# EAGLE board L1-Main (EAGLE 7.2.0)
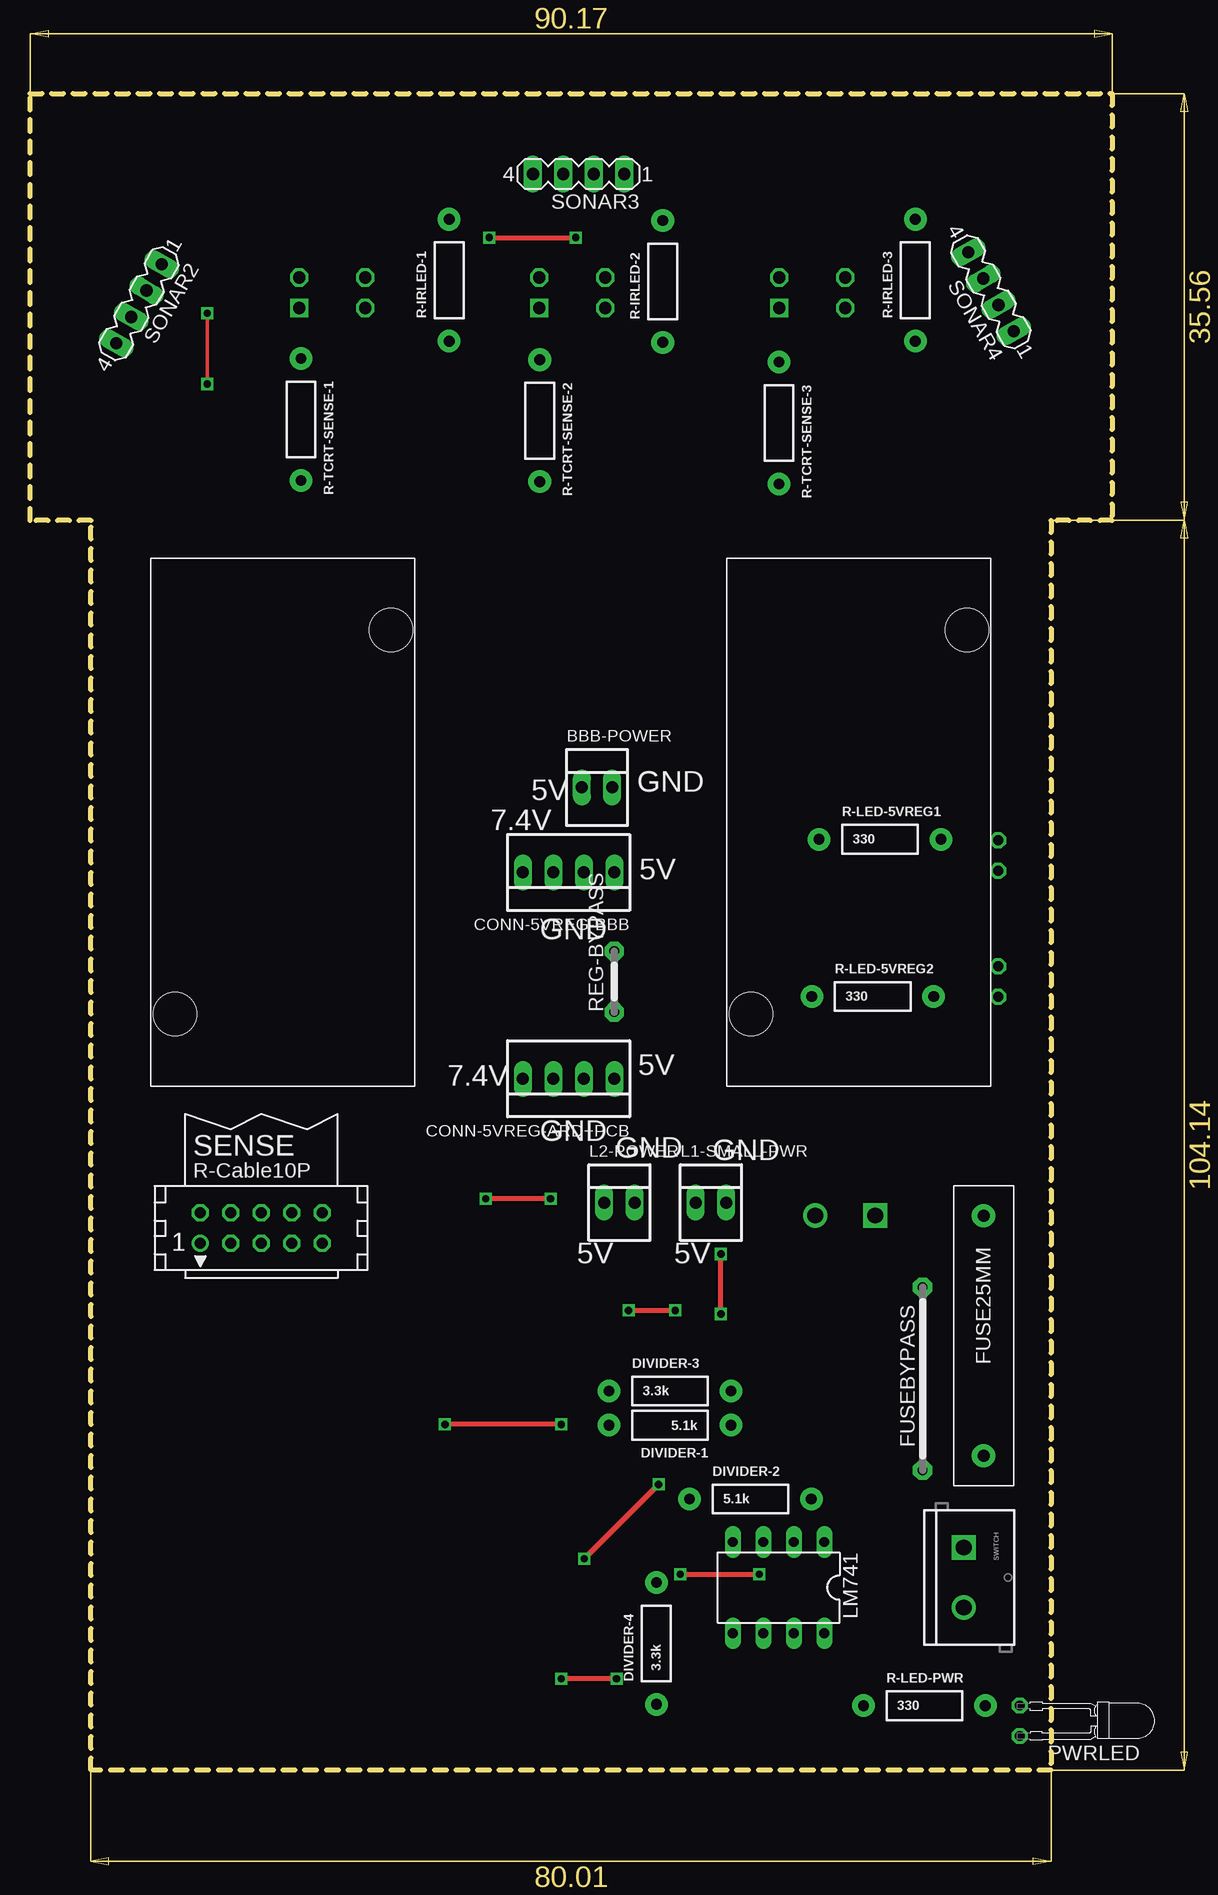
[diagram p0: board, top side]
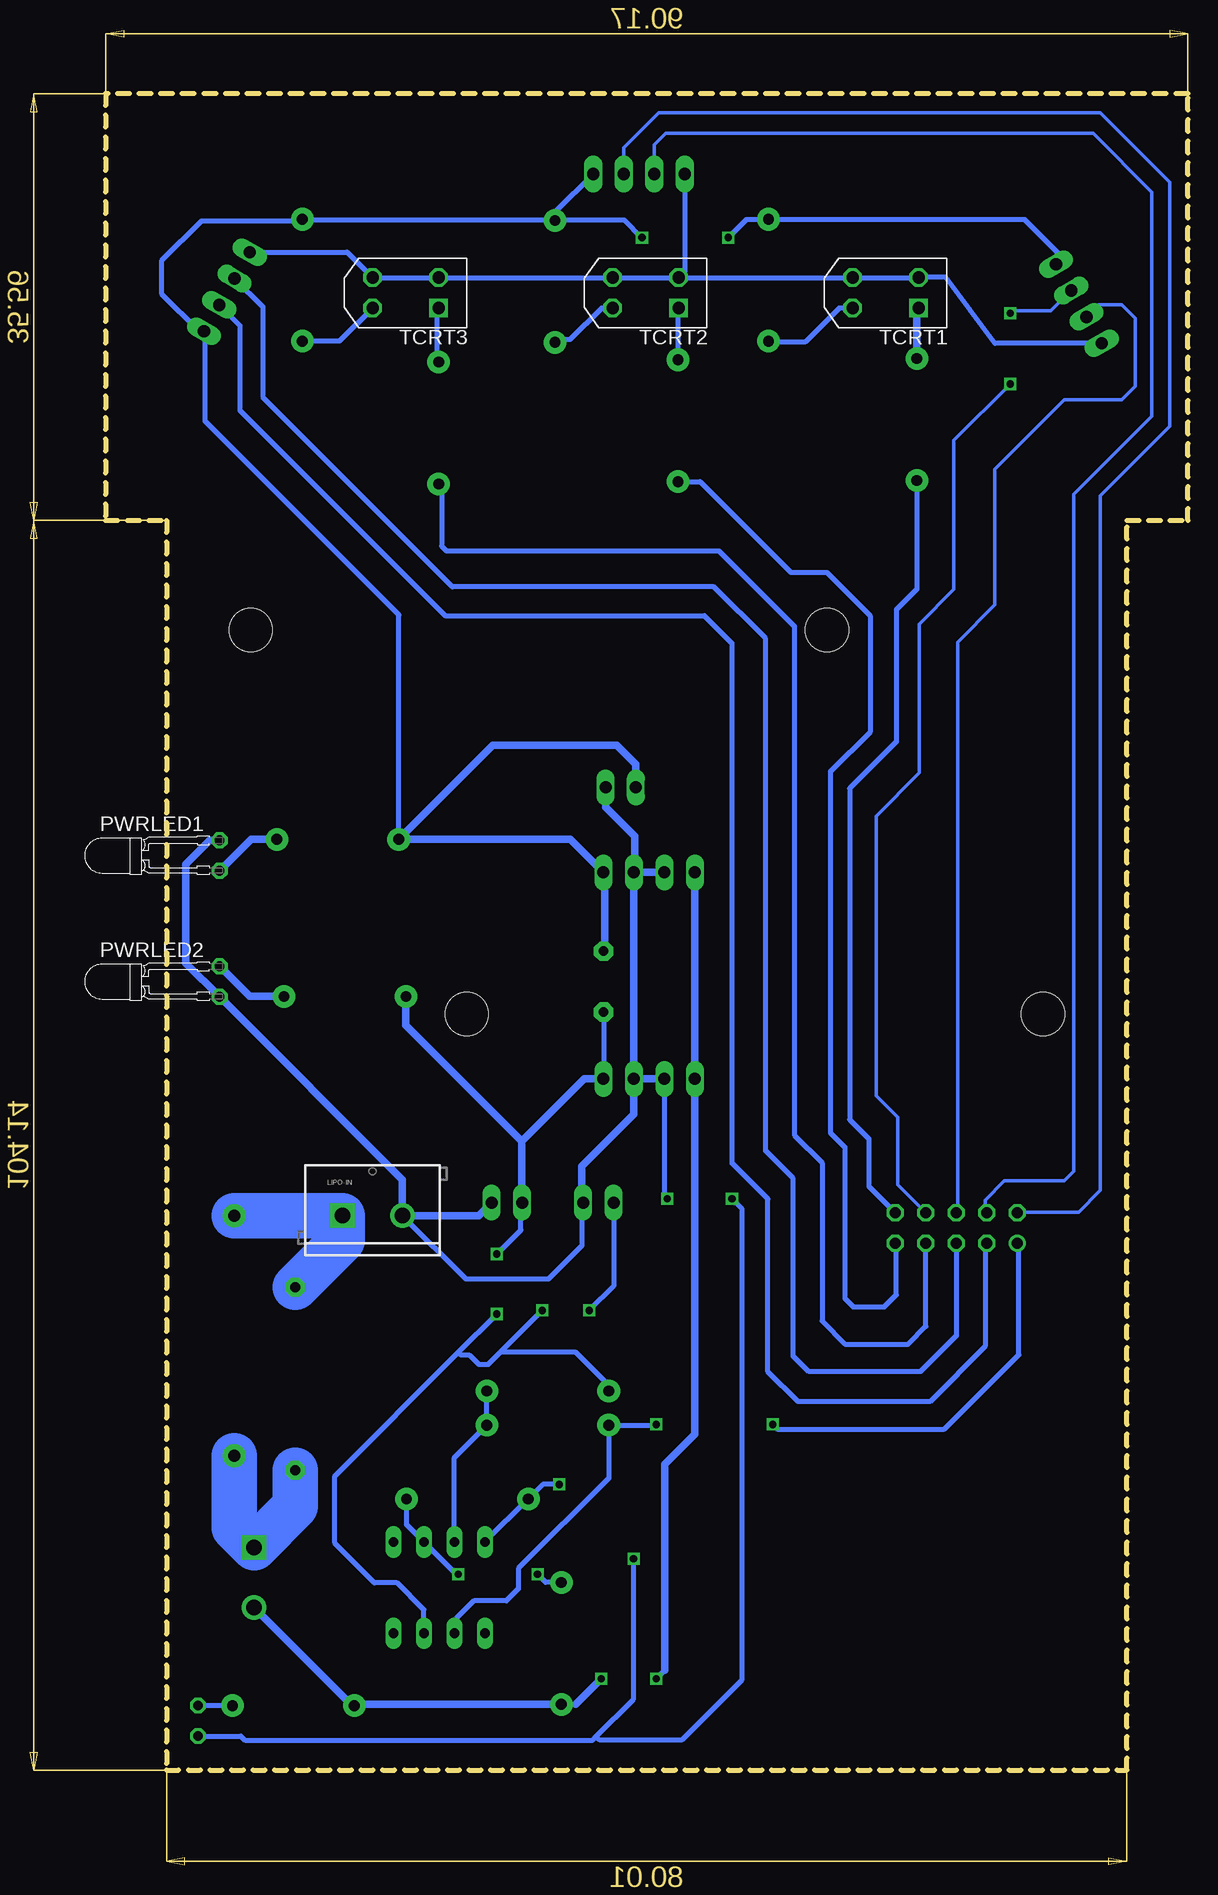
[diagram p1: board, bottom side, seen from below]

Size 90.17 x 139.7 mm. Coordinates in mm from the lower left corner, seen from the top.
Outline: 5.08,0 5.08,104.14 0,104.14 0,139.7 90.17,139.7 90.17,104.14 85.09,104.14 85.09,0 5.08,0
Copper layers (1*16): Top 0.035mm / dielectric 1.5mm / Bottom 0.035mm
Design rules "default": minimum track width 10mil, minimum drill 24mil, track to track 8mil, track to pad 8mil, pad to pad 8mil, via to via 8mil, smd to smd 8mil, copper to edge 40mil, drill to drill 8mil, minimum pad ring 10mil, minimum via ring 8mil, stop-mask expansion 4mil, vias tented up to drill 0mil, thermal gap 10mil

## Footprints (pad centres in the part's own frame; a part is rotated, then mirrored left to right if it is on the bottom)
5V3A_REG = hole 3.6: 2,6; 20,38
22-23-2021 = drill 1 long: 1 -1.27,0; 2 1.27,0
22-23-2041 = drill 1 long: 1 -3.81,0; 2 -1.27,0; 3 1.27,0; 4 3.81,0
AXIAL-0.4 = drill 0.9 pad 1.88: P$1 -5.08,0; P$2 5.08,0
15 = drill 0.813 pad 1.6 octagon: 1 -7.62,0; 2 7.62,0
SCREWTERMINAL-5MM-2 = drill 1.3 pad 2.032 square: 1 0,0 | drill 1.3 pad 2.032: 2 5,0
DIL08 = drill 0.813 long: 1 -3.81,-3.81; 2 -1.27,-3.81; 3 1.27,-3.81; 4 3.81,-3.81; 5 3.81,3.81; 6 1.27,3.81; 7 -1.27,3.81; 8 -3.81,3.81
FUSE25MM = drill 1 pad 1.93: PIN1 0,0; PIN2 20,0
LED3MM_H7,5MM = drill 0.813 pad 1.27 octagon: A 0,-1.27; K 0,1.27
05 = drill 0.813 pad 1.6 octagon: 1 -2.54,0; 2 2.54,0
CON10 = drill 0.914: 1 -5.08,-1.27 | drill 0.914 octagon: 2 -5.08,1.27; 3 -2.54,-1.27; 4 -2.54,1.27; 5 0,-1.27; 6 0,1.27; 7 2.54,-1.27; 8 2.54,1.27; 9 5.08,-1.27; 10 5.08,1.27
MA04-1 = drill 1.016 long: 1 -3.81,0; 2 -1.27,0; 3 1.27,0; 4 3.81,0
TCRT = drill 1.016 square: COLLECTOR 2.35,4.17 | drill 1.016 octagon: EMITTER 2.35,1.63; LED-GND 7.85,1.63; LED-VCC 7.85,4.17

## Placement (x,y rotation side)
5VREG-BBB  [5V3A_REG]  10.08,57 0 top
BBB-POWER  [22-23-2021]  47.25,81.88 0 top
CONN-5VREG-ARD+PCB  [22-23-2041]  44.88,57.6 180 top
CONN-5VREG-BBB  [22-23-2041]  44.88,74.8 180 top
DIVIDER-1  5.1k  [AXIAL-0.4]  53.33,28.74 180 top
DIVIDER-2  5.1k  [AXIAL-0.4]  60.03,22.58 0 top
DIVIDER-3  3.3k  [AXIAL-0.4]  53.33,31.58 0 top
DIVIDER-4  3.3k  [AXIAL-0.4]  52.2,10.55 90 top
FUSEBYPASS  [15]  74.38,32.6 90 top
L1-SMALL-PWR  5V  [22-23-2021]  56.74,47.28 0 top
L2-POWER  [22-23-2021]  49.12,47.28 0 top
LIPO-IN  [SCREWTERMINAL-5MM-2]  70.44,46.2 0 bottom
LM741  [DIL08]  62.38,15.2 180 top
PWR-SW  [FUSE25MM]  79.46,26.18 90 top
PWRLED  green  [LED3MM_H7,5MM]  82.48,4.1 180 top
PWRLED1  yellow  [LED3MM_H7,5MM]  80.68,76.2 0 bottom
PWRLED2  yellow  [LED3MM_H7,5MM]  80.68,65.7 0 bottom
R-IRLED-1  [AXIAL-0.4]  34.93,124.15 90 top
R-IRLED-2  [AXIAL-0.4]  52.73,124.05 90 top
R-IRLED-3  [AXIAL-0.4]  73.78,124.15 90 top
R-LED-5VREG1  330  [AXIAL-0.4]  70.83,77.56 0 top
R-LED-5VREG2  330  [AXIAL-0.4]  70.23,64.46 0 top
R-LED-PWR  330  [AXIAL-0.4]  74.53,5.36 0 top
R-TCRT-SENSE-1  [AXIAL-0.4]  22.58,112.54 270 top
R-TCRT-SENSE-2  [AXIAL-0.4]  42.48,112.44 270 top
R-TCRT-SENSE-3  [AXIAL-0.4]  62.42,112.25 270 top
REG-BYPASS  [05]  48.68,65.7 90 top
REG_ARD+PCB  [5V3A_REG]  58.08,57 0 top
SENSE  [CON10]  19.28,45.15 0 top
SONAR2  [MA04-1]  9.08,122.19 240 top
SONAR3  [MA04-1]  45.72,133 180 top
SONAR4  [MA04-1]  80.08,123.19 120 top
SWITCH  [SCREWTERMINAL-5MM-2]  77.81,18.54 270 top
TCRT1  [TCRT]  20.08,126 180 bottom
TCRT2  [TCRT]  40.08,126 180 bottom
TCRT3  [TCRT]  60.08,126 180 bottom

## Library data of the parts
5VREG-BBB REG_ARD+PCB = 5V3ARegulator
BBB-POWER CONN-5VREG-ARD+PCB CONN-5VREG-BBB L1-SMALL-PWR L2-POWER = con-molex
DIVIDER-1-DIVIDER-4 R-IRLED-1-R-IRLED-3 R-LED-5VREG1 R-LED-5VREG2 R-LED-PWR R-TCRT-SENSE-1-R-TCRT-SENSE-3 = SparkFun-Passives
FUSEBYPASS REG-BYPASS = jumper
LIPO-IN SWITCH = SparkFun-Connectors
LM741 = 40xx
PWR-SW = fuse25mm
PWRLED PWRLED1 PWRLED2 = led
SENSE = con-harting
SONAR2-SONAR4 = con-lstb
TCRT1-TCRT3 = tcrt

## Nets
S$1: FUSEBYPASS.2 LIPO-IN.1 PWR-SW.PIN2
S$2: FUSEBYPASS.1 PWR-SW.PIN1 SWITCH.1
S$4: PWRLED.A R-LED-PWR.P$2
S$5: R-IRLED-1.P$1 TCRT1.LED-VCC
S$6: CONN-5VREG-ARD+PCB.4 CONN-5VREG-BBB.4 DIVIDER-4.P$1 R-LED-PWR.P$1 SWITCH.2
S$7: R-TCRT-SENSE-1.P$1 TCRT1.COLLECTOR
S$8: PWRLED1.A R-LED-5VREG1.P$2
S$9: PWRLED2.K R-LED-5VREG2.P$2
S$10: SENSE.3 SONAR4.2
S$11: CONN-5VREG-ARD+PCB.1 DIVIDER-3.P$1 L1-SMALL-PWR.1 L2-POWER.1 LM741.7 R-LED-5VREG2.P$1 REG-BYPASS.1
S$12: SONAR2.4 SONAR3.4 SONAR4.4 TCRT1.EMITTER TCRT1.LED-GND TCRT2.EMITTER TCRT2.LED-GND TCRT3.EMITTER TCRT3.LED-GND
S$13: R-TCRT-SENSE-2.P$1 TCRT2.COLLECTOR
S$14: DIVIDER-1.P$1 DIVIDER-3.P$2 LM741.3
S$15: DIVIDER-2.P$2 DIVIDER-4.P$2 LM741.2
S$16: DIVIDER-1.P$2 LM741.6 SENSE.1
S$17: BBB-POWER.2 CONN-5VREG-ARD+PCB.2 CONN-5VREG-ARD+PCB.3 CONN-5VREG-BBB.2 CONN-5VREG-BBB.3 DIVIDER-2.P$1 L1-SMALL-PWR.2 L2-POWER.2 LIPO-IN.2 LM741.4 PWRLED1.K PWRLED2.A PWRLED.K
S$18: R-IRLED-2.P$1 TCRT2.LED-VCC
S$19: R-TCRT-SENSE-3.P$1 TCRT3.COLLECTOR
S$20: R-IRLED-3.P$1 TCRT3.LED-VCC
S$21: SENSE.5 SONAR4.3
S$22: SENSE.6 SONAR2.3
S$23: SENSE.8 SONAR2.2
S$24: SENSE.4 SONAR3.3
S$25: SENSE.2 SONAR3.2
S$26: R-TCRT-SENSE-3.P$2 SENSE.7
S$27: R-TCRT-SENSE-2.P$2 SENSE.9
S$28: R-TCRT-SENSE-1.P$2 SENSE.10
S$29: BBB-POWER.1 CONN-5VREG-BBB.1 R-IRLED-1.P$2 R-IRLED-2.P$2 R-IRLED-3.P$2 R-LED-5VREG1.P$1 REG-BYPASS.2 SONAR2.1 SONAR3.1 SONAR4.1

## Tracks (layer width: path | path; a pad name or v marks a point on that pad's centre or on a via)
S$1
  Bottom 3.81: FUSEBYPASS.2 70.44,44.16 LIPO-IN.1 70.46,46.18 PWR-SW.PIN2
S$2
  Bottom 3.81: PWR-SW.PIN1 79.46,20.19 SWITCH.1 74.38,21.97 FUSEBYPASS.1
S$4
  Bottom 0.406: R-LED-PWR.P$2 PWRLED.A
S$5
  Bottom 0.406: TCRT1.LED-VCC 29.05,121.83 31.88,119 35.38,119 35.48,118.9 34.98,118.4 34.98,119.02 R-IRLED-1.P$1
S$6  (via drill 0.6)
  Top 0.406: v48.88,7.6 v44.28,7.6
  Bottom 0.406: 69.34,5.47 R-LED-PWR.P$1 69.63,5.36 | DIVIDER-4.P$1 51.01,5.47 | v44.28,7.6 43.58,8.3 | CONN-5VREG-ARD+PCB.4
  Bottom 0.61: CONN-5VREG-ARD+PCB.4 CONN-5VREG-BBB.4 | DIVIDER-4.P$1 69.34,5.47 | 69.63,5.36 SWITCH.2 | 51.01,5.47 v48.88,7.6 | 43.58,8.3 43.58,25.5 41.08,28 CONN-5VREG-ARD+PCB.4
S$7
  Bottom 0.61: R-TCRT-SENSE-1.P$1 22.58,121.68 TCRT1.COLLECTOR
S$8
  Bottom 0.61: R-LED-5VREG1.P$2 78.05,77.56 PWRLED1.A
S$9
  Bottom 0.61: R-LED-5VREG2.P$2 78.17,64.46 PWRLED2.K
S$10
  Bottom 0.406: SONAR4.2 78.98,120.36 78.98,113.3 61.88,96.2 40.28,96.2 37.98,93.9 37.98,50.6 34.98,47.6 34.98,33.2 32.48,30.7 21.48,30.7 16.88,35.3 16.88,43.74 SENSE.3
S$11  (via drill 0.6)
  Top 0.406: v57.58,38 v57.58,43 | v49.88,38.3 v53.78,38.3
  Bottom 0.406: LM741.7 63.65,13.37 65.88,15.6 67.78,15.6 71.08,18.9 71.08,24.5 60.78,34.8 | 60.78,34.8 v57.58,38 | v57.58,43 55.58,45 55.58,47.17 L1-SMALL-PWR.1 | L2-POWER.1 47.85,40.33 v49.88,38.3 | v53.78,38.3 57.28,34.8 | 60.78,34.8 60.58,34.6 59.88,34.6 59.08,33.8 58.28,33.8 57.28,34.8 | DIVIDER-3.P$1 48.25,32.07 50.98,34.8 57.28,34.8 | REG-BYPASS.1 CONN-5VREG-ARD+PCB.1
  Bottom 0.61: CONN-5VREG-ARD+PCB.1 50.28,57.6 55.48,52.4 | 55.48,52.4 L1-SMALL-PWR.1 | R-LED-5VREG2.P$1 65.15,62.07 55.48,52.4
S$12
  Bottom 0.406: SONAR4.4 70.05,126.49 TCRT3.LED-GND TCRT3.EMITTER TCRT2.LED-GND TCRT2.EMITTER | TCRT2.EMITTER TCRT1.LED-GND TCRT1.EMITTER 22.4,124.4 20.18,124.4 16.07,118.89 SONAR2.4 | SONAR3.4 41.91,124.89 TCRT2.EMITTER
S$13
  Bottom 0.406: TCRT2.COLLECTOR 42.48,121.78 R-TCRT-SENSE-2.P$1
S$14
  Bottom 0.406: DIVIDER-3.P$2 DIVIDER-1.P$1 61.11,26.04 LM741.3
S$15  (via drill 0.6)
  Top 0.406: v54.18,16.3 v60.78,16.3
  Bottom 0.406: DIVIDER-4.P$2 53.51,15.63 v54.18,16.3 | v60.78,16.3 60.98,16.5 61.14,16.5 LM741.2 65.11,20.47 DIVIDER-2.P$2
S$16  (via drill 0.6)
  Top 0.406: v44.28,28.8 v34.58,28.8
  Bottom 0.406: LM741.6 60.98,11.52 60.98,12.6 59.48,14.1 56.78,14.1 55.78,15.1 55.78,16.8 48.25,24.33 DIVIDER-1.P$2 44.34,28.74 v44.28,28.8 | v34.58,28.8 34.18,28.4 20.28,28.4 14.08,34.6 14.08,43.76 SENSE.1
S$17  (via drill 0.6)
  Top 0.406: v46.18,17.6 v52.38,23.8 | v43.38,47.6 v37.98,47.6
  Bottom 0.406: LM741.4 55,22.58 DIVIDER-2.P$1 53.73,23.8 v52.38,23.8 | PWRLED.K 78.91,2.83 78.58,2.5 49.58,2.5 49.28,2.8 | 49.28,2.8 46.18,5.9 v46.18,17.6 | CONN-5VREG-ARD+PCB.3 43.61,47.83 v43.38,47.6 | v37.98,47.6 37.18,46.8 37.18,7.5 42.18,2.5 48.98,2.5 49.28,2.8 | 50.48,47.37 50.48,43.7 53.28,40.9 60.14,40.9 LIPO-IN.2
  Bottom 0.61: BBB-POWER.2 48.52,80.24 46.08,77.8 46.08,74.87 CONN-5VREG-BBB.2 | CONN-5VREG-BBB.2 CONN-5VREG-BBB.3 | CONN-5VREG-BBB.2 CONN-5VREG-ARD+PCB.2 | CONN-5VREG-ARD+PCB.2 CONN-5VREG-ARD+PCB.3 | CONN-5VREG-ARD+PCB.2 46.15,54.63 50.48,50.3 50.48,47.37 L2-POWER.2 | L1-SMALL-PWR.2 59.09,46.2 LIPO-IN.2 65.44,49.19 PWRLED2.A 83.48,67.23 83.48,75.5 81.51,77.47 PWRLED1.K
S$18
  Bottom 0.406: TCRT2.LED-VCC 48.85,121.83 51.48,119.2 52.5,119.2 R-IRLED-2.P$1
S$19
  Bottom 0.406: TCRT3.COLLECTOR 62.58,121.68 62.58,118 62.42,117.84 R-TCRT-SENSE-3.P$1
S$20
  Bottom 0.406: TCRT3.LED-VCC 70.69,119.07 R-IRLED-3.P$1
S$21
  Bottom 0.406: SONAR4.3 77.08,121.92 77.08,114.4 61.28,98.6 39.48,98.6 35.18,94.3 35.18,51.6 32.88,49.3 32.88,34.5 31.58,33.2 22.28,33.2 19.28,36.2 SENSE.5
S$22
  Bottom 0.305: SENSE.6 19.18,46.52 19.18,94 16.08,97.1 16.08,108.4 10.28,114.2 5.48,114.2 4.38,115.3 4.38,121 5.48,122.1 7.44,122.1 SONAR2.3
S$23  (via drill 0.6)
  Top 0.305: v14.78,121.4 v14.78,115.5
  Bottom 0.305: SONAR2.2 11.41,121.6 14.58,121.6 v14.78,121.4 | v14.78,115.5 19.48,110.8 19.48,98.4 22.38,95.5 22.38,83.1 25.98,79.5 25.98,56.2 24.18,54.4 24.18,48.78 SENSE.8
S$24
  Bottom 0.305: SONAR3.3 44.45,135.43 43.48,136.4 7.88,136.4 2.98,131.5 2.98,112.8 9.48,106.3 9.48,49.9 10.28,49.1 15.28,49.1 16.88,47.5 16.88,46.56 SENSE.4
S$25
  Bottom 0.305: SONAR3.2 46.99,135.19 44.08,138.1 7.28,138.1 1.48,132.3 1.48,112 7.28,106.2 7.28,48.3 9.08,46.5 14.12,46.5 SENSE.2
S$26
  Bottom 0.406: R-TCRT-SENSE-3.P$2 62.18,106.93 62.18,102 61.78,101.6 39.08,101.6 32.78,95.3 32.78,52.9 30.48,50.6 30.48,37.4 28.58,35.5 23.28,35.5 21.82,36.96 SENSE.7
S$27
  Bottom 0.406: R-TCRT-SENSE-2.P$2 40.64,107.36 33.08,99.8 30.08,99.8 26.48,96.2 26.48,86.5 29.78,83.2 29.78,53.1 28.58,51.9 28.58,39.3 27.88,38.6 25.28,38.6 24.28,39.6 24.28,43.8 SENSE.9
S$28
  Bottom 0.406: R-TCRT-SENSE-1.P$2 22.58,98.4 24.28,96.7 24.28,85.7 28.18,81.8 28.18,54.2 26.58,52.6 26.58,48.64 SENSE.10
S$29  (via drill 0.6)
  Top 0.406: v38.28,127.7 v45.48,127.7
  Bottom 0.305: R-IRLED-1.P$2 34.96,129.2
  Bottom 0.406: SONAR2.1 10.87,126.49 13.58,129.2 34.9,129.2 R-IRLED-1.P$2 34.95,129.23 | R-IRLED-2.P$2 73.68,129.13 R-IRLED-3.P$2 73.81,129.2 74.28,129.2 74.38,129.1 82.18,129.1 85.48,125.8 85.48,123 82.37,119.89 SONAR4.1 81.88,119.78 81.88,112.4 65.75,96.27 R-LED-5VREG1.P$1 | 34.96,129.2 36.78,129.2 v38.28,127.7 | v45.48,127.7 46.91,129.13 R-IRLED-2.P$2 | SONAR3.1 52.73,129.8 R-IRLED-2.P$2
  Bottom 0.61: BBB-POWER.1 45.98,83.8 47.58,85.4 57.91,85.4 R-LED-5VREG1.P$1 51.45,77.56 CONN-5VREG-BBB.1 48.58,74.69 48.58,68.3 48.64,68.24 REG-BYPASS.2

## Text on the board
tPlace: GND | 5V | 7.4V | 5V | GND | 5V | 7.4V | GND | GND | GND | 5V | 5V